# Altium PCB TS_24 UCM R1 Backup.PcbDoc
Units mm, origin at the board's own origin, x right, y up, seen from the top; angles counter-clockwise.
Board outline 86 x 54 mm, 4 copper layers (Top Layer, Int1 (PWR), Int2 (GND), Bottom Layer), stack 1.369 mm thick; 72 components, 44 nets, 273 pads, 77 vias.
Unrouted connection lines stored in the file: 6.
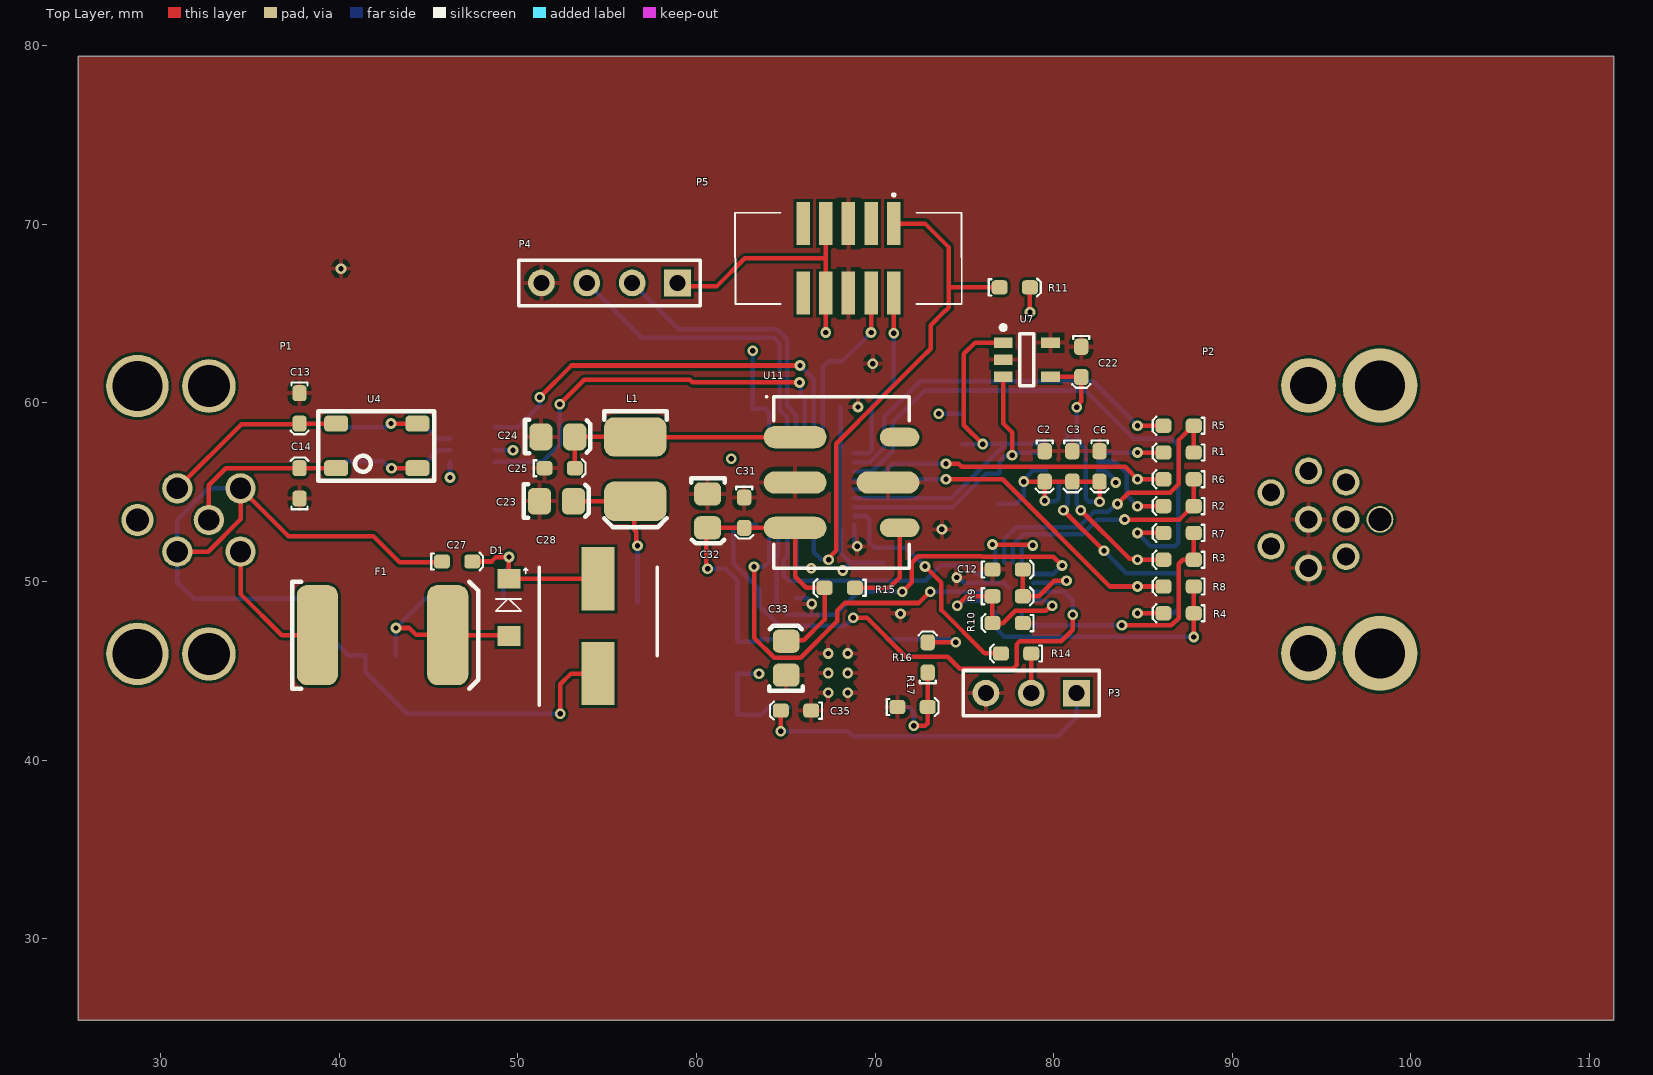
[diagram p0: Top Layer view]
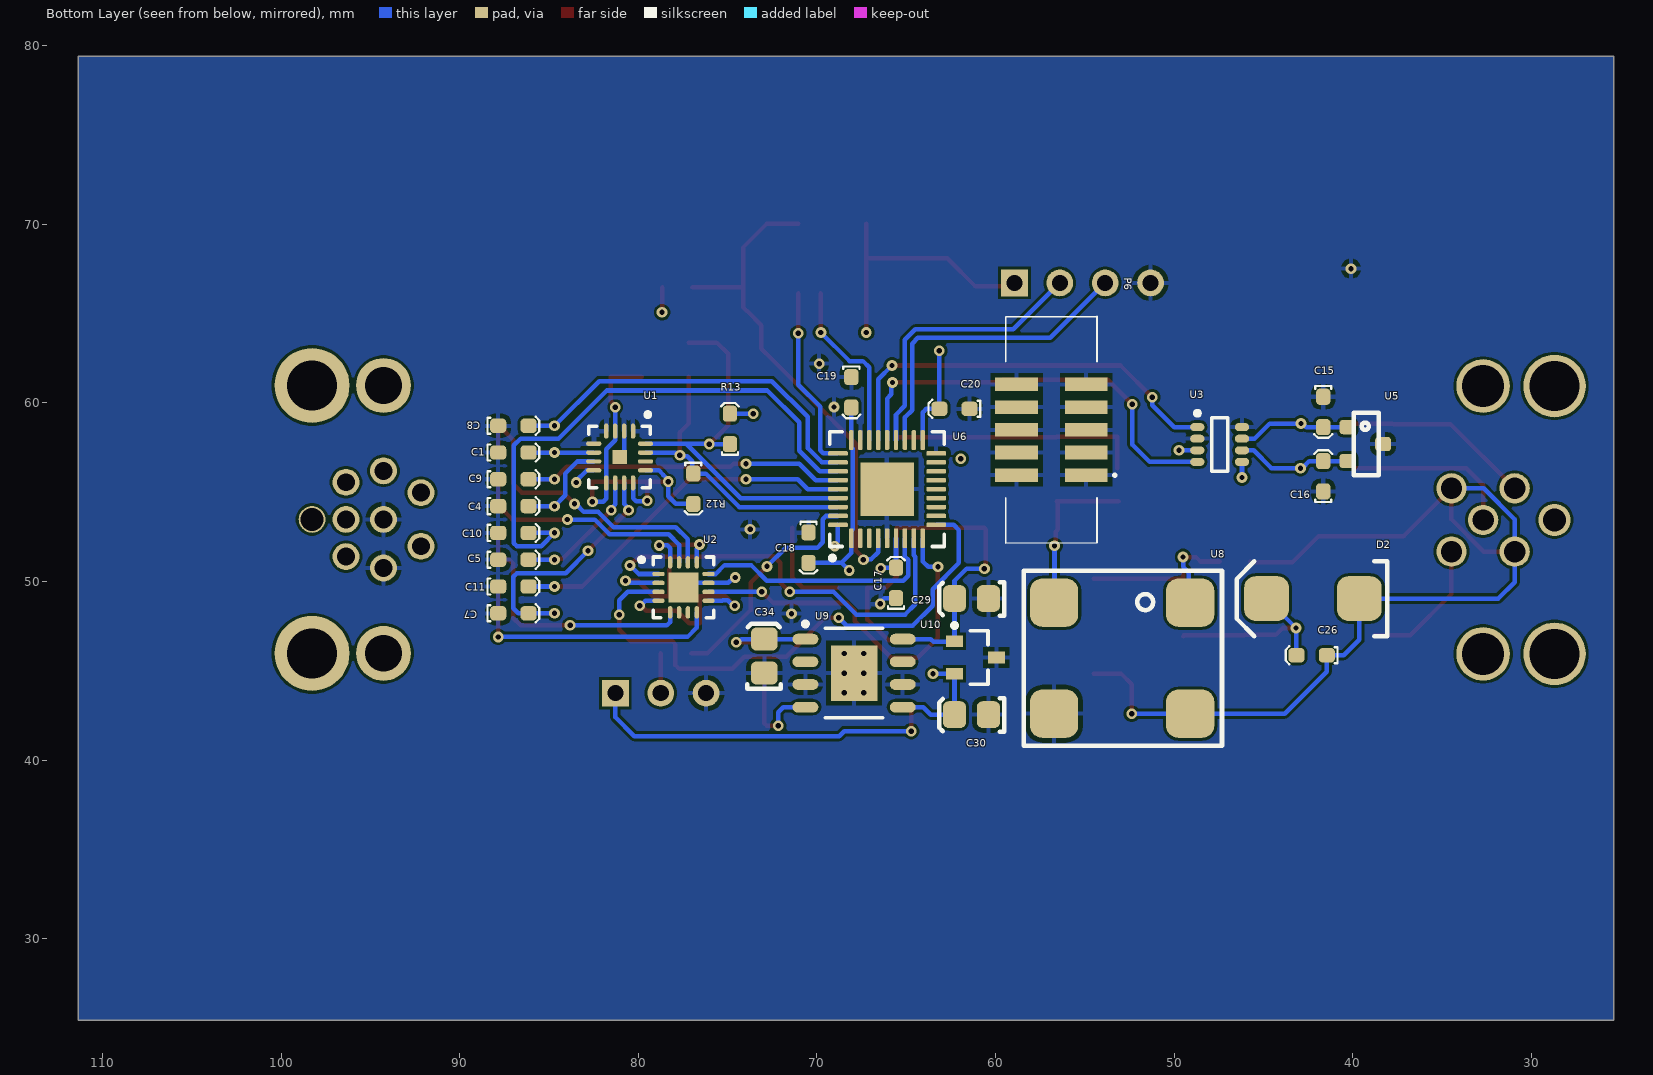
[diagram p1: Bottom Layer view, seen from below]
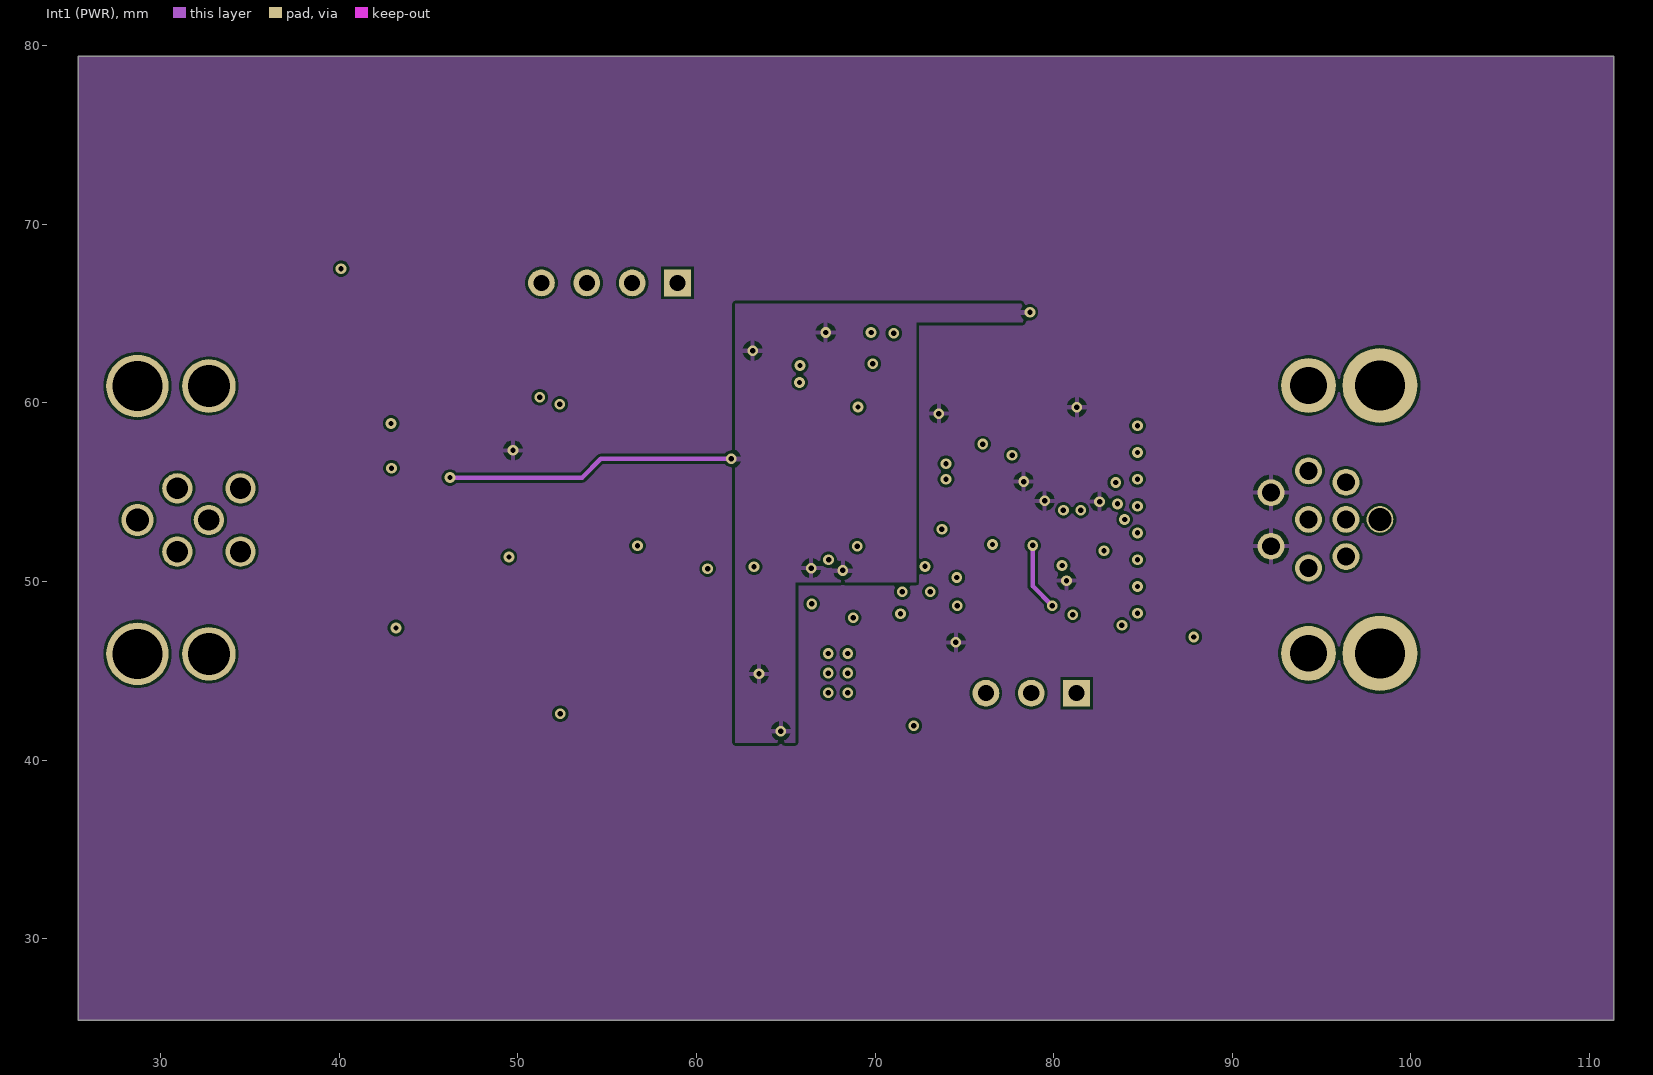
[diagram p2: Int1 (PWR)]
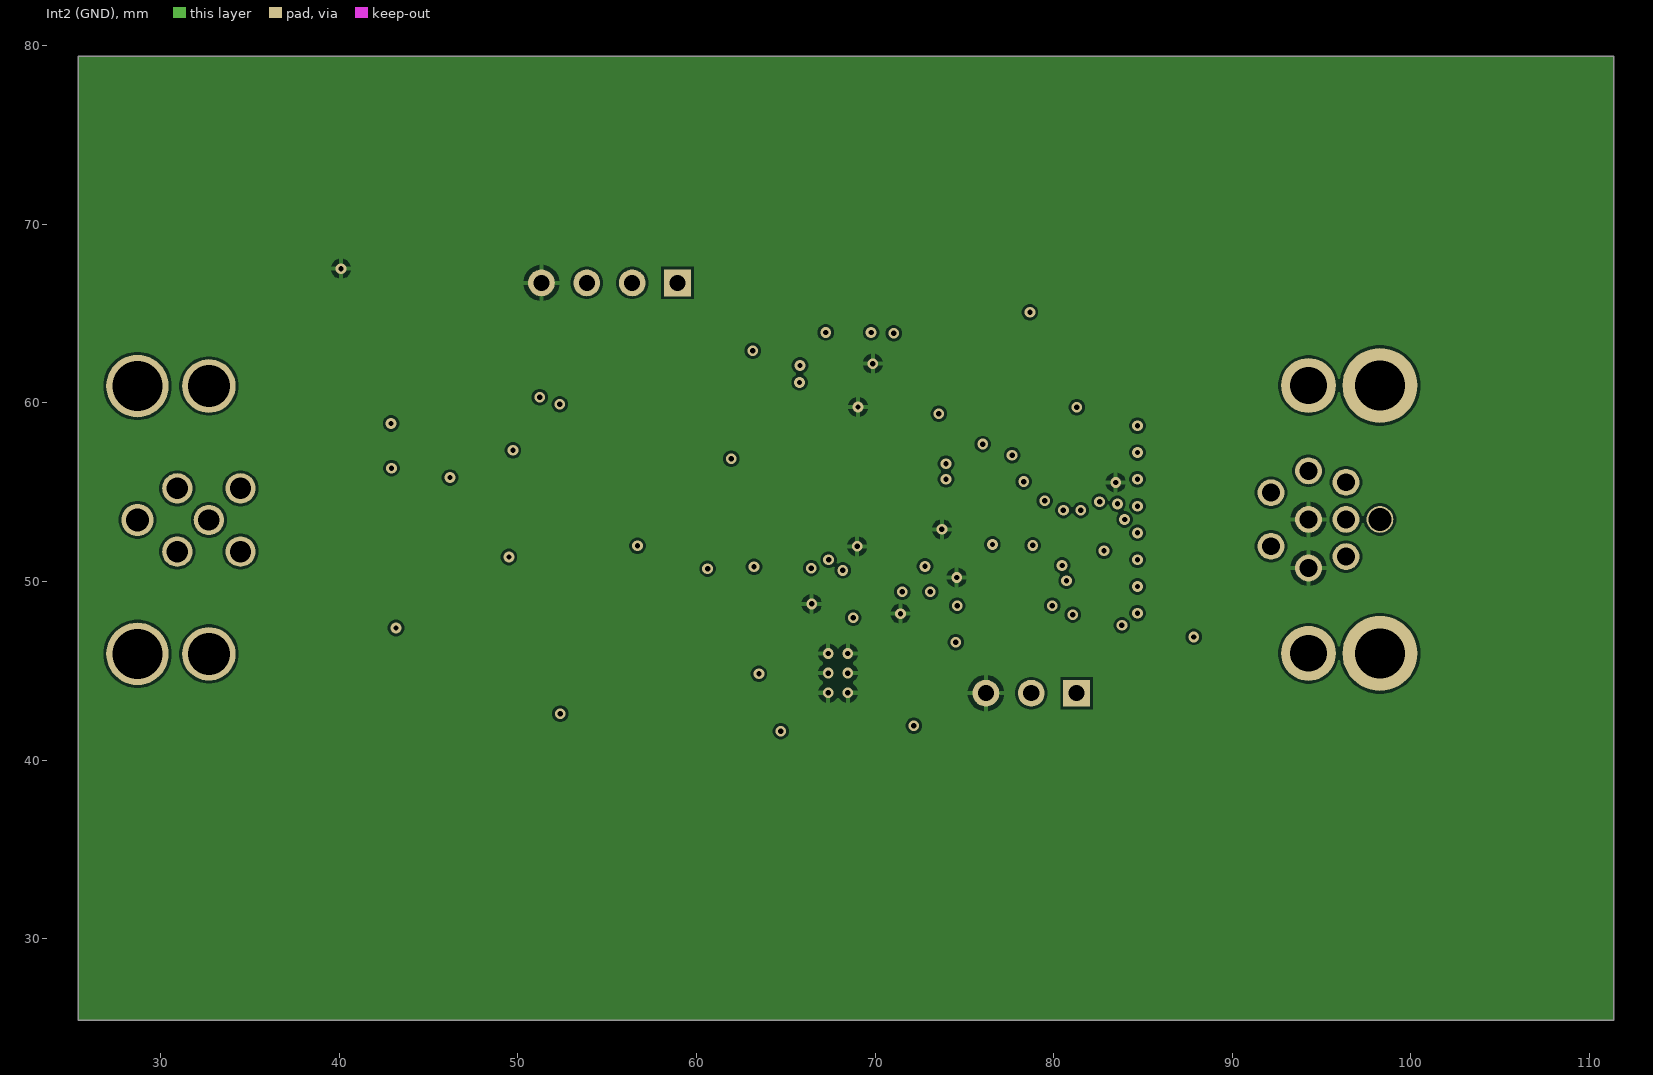
[diagram p3: Int2 (GND)]
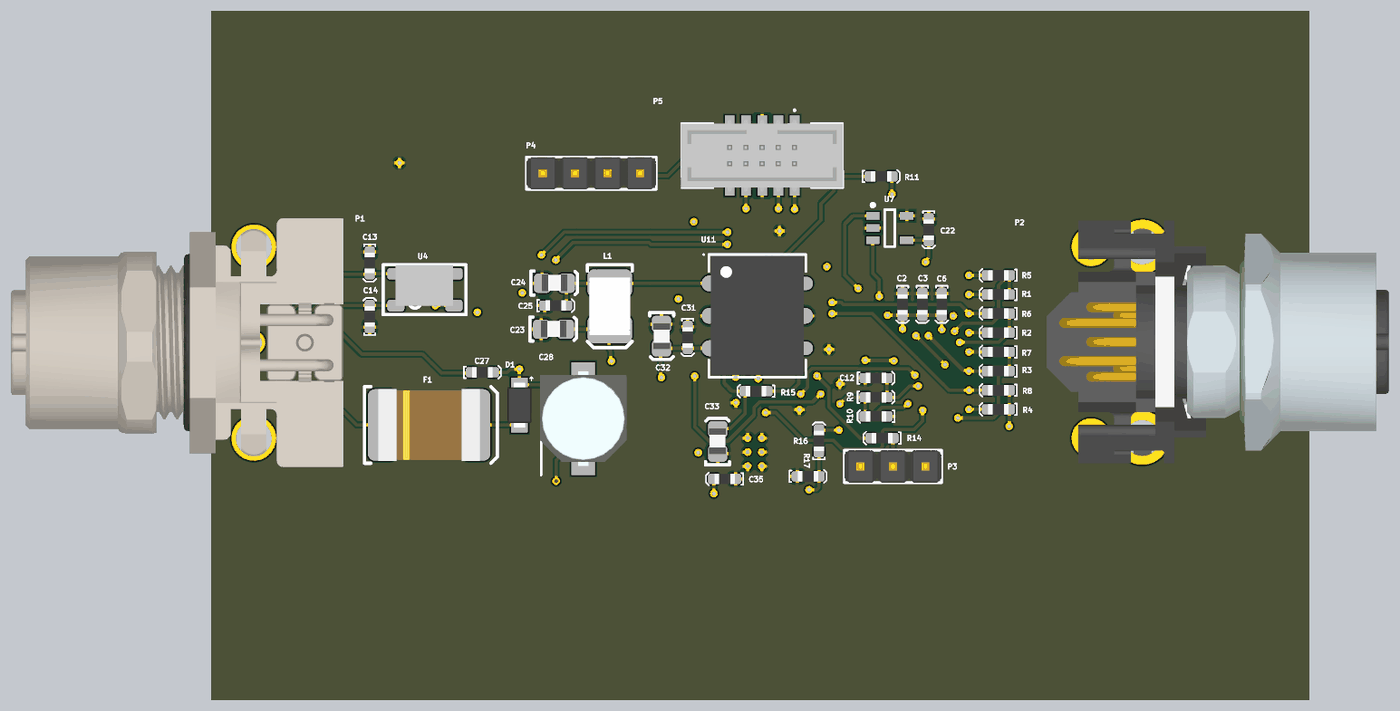
[diagram p4: 3D render of the assembled board from above, using the file's embedded part models]
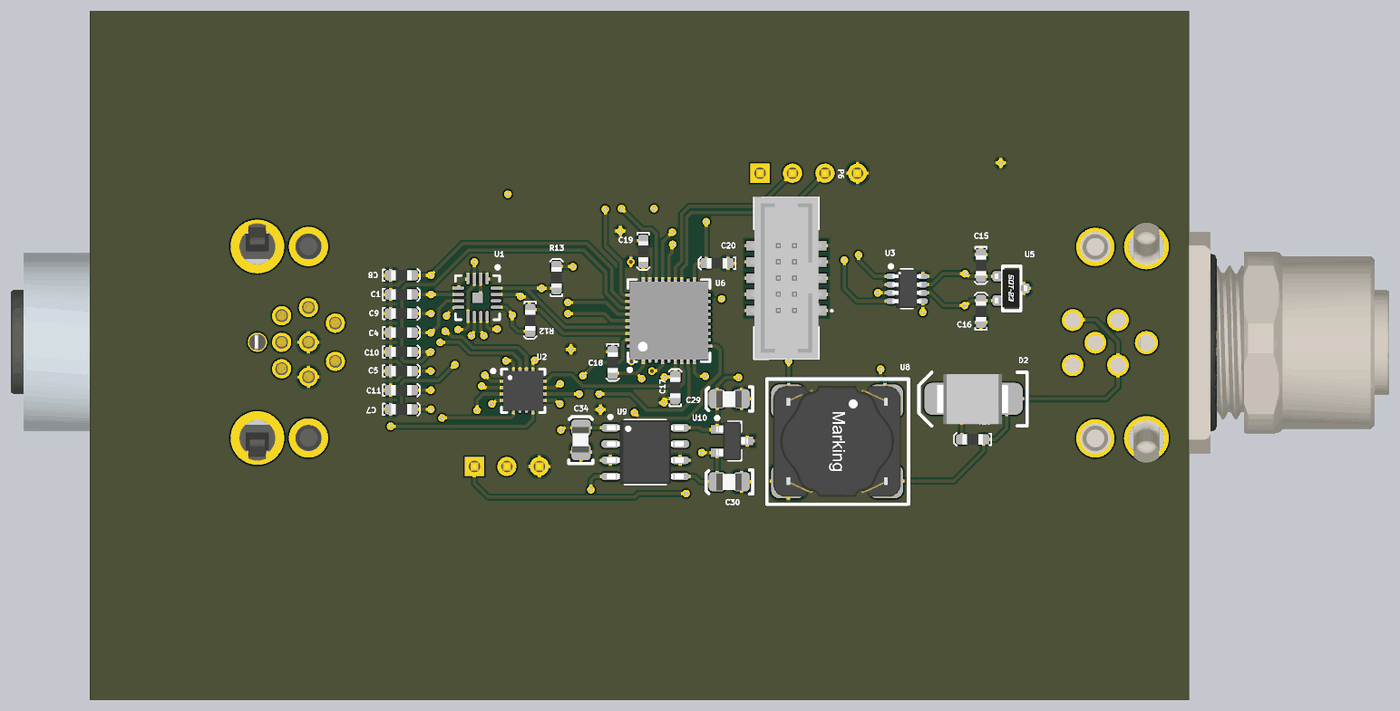
[diagram p5: 3D render of the assembled board from below, using the file's embedded part models]

## Layer stack, top to bottom
Top Solder: solder mask 0.0254, SM-001, Dk 4
Top Layer: signal copper 0.035
Dielectric 1: prepreg 0.1295, PP-017, Dk 4.3
Dielectric 2: prepreg 0.1295, PP-017, Dk 4.3
Int1 (PWR): signal copper 0.035
Dielectric 3: core 0.7112, Core-039, Dk 4.8
Int2 (GND): signal copper 0.035
Dielectric 4: prepreg 0.1295, PP-017, Dk 4.3
Dielectric 5: prepreg 0.1295, PP-017, Dk 4.3
Bottom Layer: signal copper 0.035
Bottom Solder: solder mask 0.0254, SM-001, Dk 4

## Board outline
25.375,25.425 25.375,79.425 111.375,79.425 111.375,25.425

## Design rules (kind name [scope] priority, off if disabled: settings)
Clearance Clearance_1 [(ExistsOnLayer('Int1 (PWR)') Or ExistsOnLayer('Int2 (GND)')) vs (ExistsOnLayer('Int1 (PWR)') Or ExistsOnLayer('Int2 (GND)'))] p1: gap=0.15 ignorepadtopadclearanceinfootprint=FALSE except(0.254: Hole-Hole) sourcerule=36 cellrowname=All cellrowtype=0 cellcolname=All cellcoltype=0 innerlayers=TRUE
Clearance Clearance_2 [(ExistsOnLayer('Top Layer') Or ExistsOnLayer('Bottom Layer')) vs (ExistsOnLayer('Top Layer') Or ExistsOnLayer('Bottom Layer'))] p2: gap=0.15 ignorepadtopadclearanceinfootprint=FALSE except(0.254: Hole-Hole) sourcerule=36 cellrowname=All cellrowtype=0 cellcolname=All cellcoltype=0 outerlayers=TRUE
Clearance [All] p3: gap=0.254 ignorepadtopadclearanceinfootprint=FALSE ismatrix=TRUE
PolygonConnect [All] p1: connectstyle=Relief reliefconductorwidth=0.254 reliefentries=4 polygonreliefangle="90 Angle" airgapwidth=0.254
RoutingVias [All] p1: holewidth=0.711 width=1.27 viastyle="Through Hole" minholewidth=0.711 minwidth=1.27 maxholewidth=0.711 maxwidth=1.27
SolderMaskExpansion [All] p1: expansion=0.102 istentingtop=FALSE
Width [All] p1: maxlimit=0.254 minlimit=0.254 preferedwidth=0.254
30 further rules are at their usual default settings.

## Classes and differential pairs
component class "U_Power Supply": C23 C24 C25 C26 C27 C28 C29 C30 C31 C32 C33 C34 C35 D1 D2 F1 L1 R15 R16 R17 U8 U9 U10 U11
component class U_Microcontroller: C17 C18 C19 C20 C22 P3 P4 P5 R11 R12 R13 R14 U6 U7
component class U_Digital_Outputs: C12 R9 R10 U2
component class U_Digital_Inputs: C8 C9 C10 C11 R5 R6 R7 R8
component class U_CAN: C13 C14 C15 C16 U3 U4 U5
component class U_Analog_Input: C1 C2 C3 C4 C5 C6 C7 R1 R2 R3 R4 U1
component class "Top Level": P1 P2

## Components (designator, comment, footprint, x,y, rotation, side; value= is the part's Value field where it differs from the comment)
C1 "100nF" 0603 87.85,57.225 r180 bottom
C2 "100nF" 0603 79.5,57.3 r270 top
C3 "100nF" 0603 81.05,57.3 r270 top
C4 "100nF" 0603 87.85,54.225 r180 bottom
C5 "100nF" 0603 87.85,51.225 r180 bottom
C6 "100nF" 0603 82.575,57.3 r270 top
C7 "100nF" 0603 87.85,48.225 r180 bottom
C8 "10nF" 0603 87.85,58.725 r180 bottom
C9 "10nF" 0603 87.85,55.73 r180 bottom
C10 "10nF" 0603 87.85,52.725 r180 bottom
C11 "10nF" 0603 87.85,49.725 r180 bottom
C12 "100nF" 0603 76.575,50.675 r0 top
C13 "100pF" 0603 37.775,60.55 r270 top
C14 "100pF" 0603 37.775,54.65 r90 top
C15 "100pF" 0603 41.65,60.35 r270 bottom
C16 "100pF" 0603 41.65,55.05 r90 bottom
C17 "100nF" 0603 65.575,49.075 r90 bottom
C18 "100nF" 0603 70.475,52.75 r270 bottom
C19 "100nF" 0603 68.075,61.45 r270 bottom
C20 "100nF" 0603 61.45,59.675 r0 bottom
C22 "100nF" 0603 81.55,63.15 r270 top
C23 "10uF" 0805 52.175,54.526 r0 top
C24 "10uF" 0805 52.25,58.126 r0 top
C25 "100nF" 0603 51.488,56.35 r0 top
C26 "100nF" 0603 41.45,45.875 r0 bottom
C27 "100nF" 0603 45.75,51.125 r0 top
C28 "47uF" "CHEMI-CON ELCO" 54.5,47.5 r90 top
C29 "1µF" 0805 61.362,49.025 r0 bottom
C30 "10uF" 0805 61.362,42.525 r0 bottom
C31 "100nF" 0603 62.675,54.71 r270 top
C32 "22uF" 0805 60.65,53.948 r270 top
C33 "1µF" 0805 65,45.725 r90 top
C34 "10uF" 0805 72.975,45.842 r90 bottom
C35 "100nF" 0603 66.425,42.775 r180 top
D1 "PMEG100T10ELR-QX" "NXP SOD123W" 49.5,48.55 r270 top
D2 "SM6T36CAY" "ST SMB DIODE" 42.225,49.05 r180 bottom
F1 "0ZCF0100AF2A" 2920 38.775,47 r0 top
L1 "12uH" 1812 56.575,56.3 r270 top
P1 "NMEA" 43-01203 32.7,53.45 r90 top
P2 "43-02639" 43-02639 94.275,53.48 r90 top
P3 "2.54mm" "TH 2.54mm Header 1x3" 81.29,43.75 r180 top
P4 "2.54mm" "TH 2.54mm Header 1x4" 58.94,66.725 r180 top
P5 "1.27mm" 3221-10-0300-00 68.51,68.1 r180 top
P6 "1.27mm" 3221-10-0300-00 56.875,58.5 r90 bottom (schematic designator P5)
R1 "510R" 0603 87.85,57.225 r180 top
R2 "510R" 0603 87.85,54.225 r180 top
R3 "510R" 0603 87.85,51.225 r180 top
R4 "510R" 0603 87.85,48.225 r180 top
R5 "10k" 0603 87.85,58.725 r180 top
R6 "10k" 0603 87.85,55.73 r180 top
R7 "10k" 0603 87.85,52.725 r180 top
R8 "10k" 0603 87.85,49.725 r180 top
R9 "20K" 0603 76.575,49.175 r0 top
R10 "10k" 0603 78.275,47.675 r180 top
R11 "10k" 0603 76.975,66.475 r0 top
R12 "2K" 0603 76.925,56.05 r270 bottom
R13 "2K" 0603 74.875,57.7 r90 bottom
R14 "10k" 0603 78.75,45.975 r180 top
R15 "330K" 0603 68.875,49.65 r180 top
R16 "10k" 0603 72.95,44.9 r90 top
R17 "20K" 0603 71.25,42.975 r0 top
U1 "ADS122C04IRTER" "TI 16-WQFN (3x3)" 81.05,56.975 r270 bottom
U2 "TLV9004IRTER" "TI 16-WQFN (3x3, 1.68mm)" 77.475,49.675 r180 bottom
U3 "TCAN1044AVDDFRQ1" "TI SOT23-8" 47.45,57.675 r180 bottom
U4 "B82787C0104H002" "TDK 4-PC Pad" 39.825,56.35 r0 top value="100µH @ 100kHz"
U5 "NUP2105L" "ON SOT-23" 39.3,57.7 r270 bottom
U6 "STM32F103T8U6" STM_QFN-36 66.075,55.175 r90 bottom
U7 "24FC16T-E/OT" "MCP SOT-23-5" 78.5,62.425 r0 top
U8 "744272121" "Wurth 4-PC Pad" 56.72,42.6 r180 bottom value="120uH @ 100kHz"
U9 "TPS7B4253-Q1" "TI 8-PowerSOIC" 67.925,44.875 r180 bottom
U10 "AP7375" "DI SOT-23-3" 61.125,45.75 r180 bottom
U11 "K78X6MT-500R4" K78X6MT-500R4 68.125,55.55 r0 top

## Footprints (in the part's own frame and the unit in brackets; to place one, negate y for a bottom-side part, rotate by r counter-clockwise, add the part's x,y. Pads: shape width x height; smd on the part's side, far side on the other; paste and mask are expansions set on the pad)
43-01203 [mm]
  round 1.7 hole 1.2: 1(1.77,-1.77) 2(-1.77,-1.77) 3(-1.77,1.77) 4(1.77,1.77) 5(0,0)
  round 3 hole 2.35: 15(-7.5,0) 15(7.5,0)
  round 3.5 hole 2.8: 15(-7.5,4) 15(7.5,4)
  round 1.8 hole 1.3: 15(0,4)
  body extent -9.75,-3 9.75,23, height 16
43-02639 [mm]
  round 1.5 hole 1: 1(-1.5,2.1) 2(1.5,2.1) 3(2.72,0) 4(2.08,-2.1) 5(0,-2.1) 6(-2.08,-2.1) 7(-2.72,0) 8(0,0)
  round 3.075 hole 2.05: MH1(-7.5,0) MH3(7.5,0)
  round 4.2 hole 2.8: MH2(-7.5,-4) MH4(7.5,-4)
  round 1.5 hole 1.3: MH5(0,-4)
  body extent -9.48,-23.3 9.52,3.5, height 16.1
0603 [mm]
  rrect50% 0.9x0.8 smd: 1(0,0) 2(1.7,0)
  silkscreen extent -0.6,-0.5 2.3,0.5, body extent 0.05,-0.42 1.65,0.43, height 0.6
0805 [mm]
  rrect50% 1.3x1.5 smd: 1(-0.962,-0.026) 2(0.938,-0.026)
  silkscreen extent -1.85,-0.95 1.8,0.93, body extent -1,-0.65 1,0.66, height 0.73
1812 [mm]
  rrect50% 2.2x3.5 smd: 1(-1.8,0) 2(1.8,0)
  silkscreen extent -3.25,-1.75 3.25,1.75, body extent -2.25,-1.6 2.25,1.6, height 2.5
2920 [mm]
  rrect50% 2.3x5.6 smd: 1(0,0) 2(7.3,0)
  silkscreen extent -1.4,-3 9,3, body extent -0.34,-2.81 7.64,2.81, height 1.14
3221-10-0300-00 [mm]
  rect 0.76x2.4 smd: 1(-2.54,-1.95) 2(-2.54,1.95) 3(-1.27,-1.95) 4(-1.27,1.95) 5(0,-1.95) 6(0,1.95) 7(1.27,-1.95) 8(1.27,1.95) 9(2.54,-1.95) 10(2.54,1.95)
  silkscreen extent -6.35,-3.6 6.35,2.55, body extent -6.34,-2.8 6.36,2.8, height 5.25
"CHEMI-CON ELCO" [mm]
  rect 3.55x1.85 smd: 1(-2.65,0) 2(2.65,0)
  silkscreen extent -4.43,-3.3 3.3,3.3, body extent -3.7,-3.4 3.7,3.4, height 6.1
"DI SOT-23-3" [mm] "SOT23, 3-Leads, Body 2.90x2.40mm, Pitch 0.92mm, IPC Medium Density"
  rect 0.95x0.65 smd: 1(-1.175,0.915) 2(-1.175,-0.915) 3(1.175,0)
  silkscreen extent -1.3,-1.5 0.7,1.91, body extent -1.25,-1.5 1.25,1.5, height 1.1
K78X6MT-500R4 [mm] "PSON, 6-Leads, Body 9.00x7.00mm, Pitch 2.54mm, IPC Low Density"
  oval 3.52x1.25 smd: 1(-2.6,2.54) 2(-2.6,0) 3(-2.6,-2.54) 5(2.6,0)
  oval 2.22x1.05 smd: 4(3.25,-2.54) 6(3.25,2.54)
  silkscreen extent -4.25,-4.8 3.8,4.85, body extent -3.65,-4.65 3.65,4.65, height 3.4
"MCP SOT-23-5" [mm] "SOT23, 5-Leads, Body 2.90x2.80mm, Pitch 0.95mm, IPC Medium Density"
  rect 1.05x0.6 smd: 1(-1.325,0.95) 2(-1.325,0) 3(-1.325,-0.95) 4(1.325,-0.95) 5(1.325,0.95)
  silkscreen extent -1.45,-1.45 0.4,1.92, body extent -0.8,-1.45 0.8,1.45, height 1.45
"NXP SOD123W" [mm]
  rect 1.1x1.3 smd: A(1.6,0) K(-1.6,0)
  silkscreen extent -2.2,-0.73 0.2,1.04, body extent -1.75,-0.95 1.75,0.95, height 1.1
"ON SOT-23" [mm] "NUP2105L"
  rrect50% 0.8x0.9 smd: 1(-0.95,-1) 2(0.95,-1) 3(0,1)
  silkscreen extent -1.75,-0.65 1.75,0.75, body extent -1.5,-1.28 1.5,1.27, height 1
"ST SMB DIODE" [mm]
  rrect50% 2.5x2.5 smd: A(2.6,0) K(-2.6,0)
  silkscreen extent -4.28,-2.12 4.17,2.08, body extent -2.88,-1.99 2.72,1.95, height 2.5
STM_QFN-36 [mm]
  rrect50% 1.1x0.25 smd: 1(-2.75,2) 2(-2.75,1.5) 3(-2.75,1) 4(-2.75,0.5) 5(-2.75,0) 6(-2.75,-0.5) 7(-2.75,-1) 8(-2.75,-1.5) 9(-2.75,-2) 19(2.75,-2) 20(2.75,-1.5) 21(2.75,-1) 22(2.75,-0.5) 23(2.75,0) 24(2.75,0.5) 25(2.75,1) 26(2.75,1.5) 27(2.75,2)
  rrect50% 0.25x1.1 smd: 10(-2,-2.75) 11(-1.5,-2.75) 12(-1,-2.75) 13(-0.5,-2.75) 14(0,-2.75) 15(0.5,-2.75) 16(1,-2.75) 17(1.5,-2.75) 18(2,-2.75) 28(2,2.75) 29(1.5,2.75) 30(1,2.75) 31(0.5,2.75) 32(0,2.75) 33(-0.5,2.75) 34(-1,2.75) 35(-1.5,2.75) 36(-2,2.75)
  rect 3x3 smd: 18(0,0)
  silkscreen extent -3.98,-3.21 3.21,3.21, body extent -3.08,-3.08 3.08,3.08, height 1
"TDK 4-PC Pad" [mm]
  rrect50% 1.35x0.9 smd: 1(0,2.5) 2(0,0) 3(4.55,0) 4(4.55,2.5)
  silkscreen extent -1,-0.7 5.5,3.2, body extent -0.02,-0.02 4.48,3.18, height 2.8
"TH 2.54mm Header 1x3" [mm]
  rect 1.5x1.5 hole 0.9: 1(0,0)
  round 1.5 hole 0.9: 2(2.54,0) 3(5.08,0)
  silkscreen extent -1.27,-1.27 6.35,1.27, body extent -1.27,-1.27 6.35,1.27, height 9.5
"TH 2.54mm Header 1x4" [mm]
  rect 1.5x1.5 hole 0.9: 1(0,0)
  round 1.5 hole 0.9: 2(2.54,0) 3(5.08,0) 4(7.62,0)
  silkscreen extent -1.27,-1.27 8.89,1.27, body extent -1.27,-1.27 8.89,1.27, height 9.5
"TI 8-PowerSOIC" [mm] "SOIC, 8-Leads, Body 4.90x3.90mm, Pitch 1.27mm, Thermal Pad 3.10x2.60mm, IPC Medium Density"
  oval 1.45x0.6 smd: 1(-2.725,1.905) 2(-2.725,0.635) 3(-2.725,-0.635) 4(-2.725,-1.905) 5(2.725,-1.905) 6(2.725,-0.635) 7(2.725,0.635) 8(2.725,1.905)
  rect 2.6x3.1 smd: 3(0,0)
  silkscreen extent -2.85,-2.5 1.6,2.88, body extent -3,-2.5 3,2.5, height 1.7
"TI 16-WQFN (3x3)" [mm] "QFN, 16-Leads, Body 3.00x3.00mm, Pitch 0.50mm, Thermal Pad 0.80x0.80mm, IPC High Density"
  oval 0.85x0.25 smd: 1(-1.45,0.75) 2(-1.45,0.25) 3(-1.45,-0.25) 4(-1.45,-0.75) 9(1.45,-0.75) 10(1.45,-0.25) 11(1.45,0.25) 12(1.45,0.75)
  rect 0.8x0.8 smd: 4(0,0)
  oval 0.25x0.85 smd: 5(-0.75,-1.45) 6(-0.25,-1.45) 7(0.25,-1.45) 8(0.75,-1.45) 13(0.75,1.45) 14(0.25,1.45) 15(-0.25,1.45) 16(-0.75,1.45)
  silkscreen extent -2.5,-1.72 1.72,1.73, body extent -1.6,-1.57 1.55,1.58, height 0.8
"TI 16-WQFN (3x3, 1.68mm)" [mm] "QFN, 16-Leads, Body 3.00x3.00mm, Pitch 0.50mm, Thermal Pad 1.68x1.68mm, IPC High Density"
  oval 0.7x0.25 smd: 1(-1.4,0.75) 2(-1.4,0.25) 3(-1.4,-0.25) 4(-1.4,-0.75) 9(1.4,-0.75) 10(1.4,-0.25) 11(1.4,0.25) 12(1.4,0.75)
  oval 0.25x0.7 smd: 5(-0.75,-1.4) 6(-0.25,-1.4) 7(0.25,-1.4) 8(0.75,-1.4) 13(0.75,1.4) 14(0.25,1.4) 15(-0.25,1.4) 16(-0.75,1.4)
  rect 1.68x1.68 smd: 11(0,0)
  silkscreen extent -2.48,-1.7 1.7,1.7, body extent -1.55,-1.55 1.55,1.55, height 0.8
"TI SOT23-8" [mm] "TSOP, 8-Leads, Body 2.90x1.60mm, Pitch 0.65mm, IPC High Density"
  oval 0.8x0.45 smd: 1(-1.25,0.975) 2(-1.25,0.325) 3(-1.25,-0.325) 4(-1.25,-0.975) 5(1.25,-0.975) 6(1.25,-0.325) 7(1.25,0.325) 8(1.25,0.975)
  silkscreen extent -1.38,-1.5 0.45,1.87, body extent -1.15,-1.5 1.15,1.5, height 1.1
"Wurth 4-PC Pad" [mm]
  rrect50% 2.7x2.7 smd: 1(7.62,6.22) 2(0,6.22) 3(0,0) 4(7.62,0)
  silkscreen extent -1.7,-1.8 9.4,8, body extent -1.19,-1.24 8.81,7.46, height 6.2

## Part data
C1 C2 C3 C4 C5 C6 C7 C12 C17 C18 C19 C20 C22 C25 C26 C27 C31 C35: library part GCM188L81H104KA57D, Digikey Part Number=490-6049-1-ND, Manufacturer=muRata, Rated Voltage=50V, Temperature Rating=X8L, Tolerance=±10%, Material=MLCC, Part Number=GCM188L81H104KA57D
C8 C9 C10 C11: library part GCM188L81H103KA03D, Digikey Part Number=490-GCM188L81H103KA03DCT-ND, Manufacturer=muRata, Rated Voltage=50V, Temperature Rating=X8L, Tolerance=±10%, Material=MLCC, Part Number=GCM188L81H103KA03D
C13 C14 C15 C16: library part GRM1885C1H101JA01D, Digikey Part Number=490-1427-1-ND, Manufacturer="Murata Electronics", Rated Voltage=50V, Temperature Rating="C0G, NP0", Tolerance=±5%, Material=MLCC, Part Number=GRM1885C1H101JA01D
C23 C24 C30 C34: library part GRM21BR6YA106KE43L, Digikey Part Number=490-10514-6-ND, Manufacturer=muRata, Rated Voltage=50V, Temperature Rating=X5R, Tolerance=10%, Material=MLCC, Part Number=GRM21BR6YA106KE43L
C28: library part HHXA350ARA470MF61G, Part Number=HHXA350ARA470MF61G
C29 C33: library part GCM21BR71H105KA03L, Digikey Part Number=490-10675-1-ND, Manufacturer=muRata, Rated Voltage=50V, Temperature Rating=X7R, Tolerance=±10%, Material=MLCC, Part Number=GCM21BR71H105KA03L
C32: library part GRM21BR61A226ME51L, Digikey Part Number=490-10511-1-ND, Manufacturer=muRata, Rated Voltage=50V, Temperature Rating=X5R, Tolerance=20%, Material=MLCC, Part Number=GRM21BR61A226ME51L
D1: Breakdown Voltage="100 V", Digikey Part Number=1727-PMEG100T10ELR-QXCT-ND, Forward Voltage="0.75 V @ 1A", Manufacturer="Nexperia USA Inc.", Rated Power="680 mW", Part Number=PMEG100T10ELR-QX
D2: Breakdown Voltage="30.8 V", Digikey Part Number=497-10804-1-ND, Manufacturer=STMicroelectronics, Rated Power=600W, Forward Voltage="30.8 V", Part Number=SM6T36CAY
F1: "PTC RESET FUSE 60V 1A 292", Digikey Part Number=507-2070-1-ND, Manufacturer="Littelfuse Inc.", Digikey Link=https://www.digikey.com/product-detail/en/bel-fuse-inc/0ZCF0100AF2A/507-2070-1-ND/6210547, Part Number=0ZCF0100AF2A
L1: library part RLS-126, Digikey Part Number=945-3429-ND, Manufacturer=Recom, Rated Current="0.8 A", Tolerance=0.2, Impedance=230mOhm, Material=Wirewound, Part Number=RLS-126
P1: library part 43-01203, "M12 NMEA 2000 Header", Digikey Part Number=626-1511-ND, Angle=90, Contact=Gold, Flange=Yes, Part Number=43-01203, Positions=5
P2: "M12, 8 Pin Connector", Angle=90, Contact="Copper Alloy", Flange=Yes, Part Number=43-02639, Positions=8
P3: library part "TH 2.54mm Header 1x3", Angle=0, Contact=NA, Flange=No, Part Number="TH 2.54mm Header 1x3", Pitch=2.54mm, Positions=3, Row Spacing=2.54mm
P4: library part "TH 2.54mm Header 1x4", Angle=0, Contact=NA, Flange=No, Part Number="TH 2.54mm Header 1x4", Pitch=2.54mm, Positions=4, Row Spacing=2.54mm
P5 P6: library part "SMD 1.27mm Header 2x5 (3221-10-0300-00)", Angle=0, Contact=NA, Flange=No, Part Number="SMD 1.27mm Header 2x5 (3221-10-0300-00)", Pitch=1.27mm, Positions=10, Row Spacing=1.27mm
R1 R2 R3 R4: library part RC0603FR-07510RL, Digikey Part Number=311-510HRCT-ND, Manufacturer=YAGEO, Rated Power=0.1W, Tolerance=0.01, Material=FR-07, Part Number=RC0603FR-07510RL
R5 R6 R7 R8 R10 R11 R14 R16: library part RC0603FR-0710KL, Digikey Part Number=311-10.0KHRCT-ND, Manufacturer=YAGEO, Rated Power=0.1W, Tolerance=0.01, Material=FR-07, Part Number=RC0603FR-0710KL
R9 R17: library part RC0603FR-0720KL, Digikey Part Number=311-20.0KHRCT-ND, Manufacturer=YAGEO, Rated Power=0.1W, Tolerance=0.01, Material=FR-07, Part Number=RC0603FR-0720KL
R12 R13: library part RC0603FR-072KL, Digikey Part Number=311-2.00KHRCT-ND, Manufacturer=YAGEO, Rated Power=0.1W, Tolerance=0.01, Material=FR-07, Part Number=RC0603FR-072KL
R15: library part RC0603JR-07330KL, Digikey Part Number=311-330KGRCT-ND, Manufacturer=YAGEO, Rated Power=0.1W, Tolerance=0.01, Material=FR-07, Part Number=RC0603JR-07330KL
U1: "IC ADC 24BIT SIGMA-DELTA 16WQFN", Digikey Part Number=296-50886-1-ND, Manufacturer="Texas Instruments", Complex IC=1, Digikey Link=https://www.digikey.com.au/en/products/detail/texas-instruments/ADS122C04IRTER/9665929, Part Number=ADS122C04IRTER
U2: "IC OPAMP GP 4 CIRCUIT 16WQFN", Digikey Part Number=296-51828-1-ND, Manufacturer="Texas Instruments", Complex IC=0, Digikey Link=https://www.digikey.com.au/en/products/detail/texas-instruments/TLV9004IRTER/9674913, Part Number=TLV9004IRTER
U3: "IC TRANSCEIVER HALF 1/1 TSOT23-8", Digikey Part Number=296-TCAN1044AVDDFRQ1CT-ND, Manufacturer="Texas Instruments", Complex IC=0, Part Number=TCAN1044AVDDFRQ1
U4: Digikey Part Number=495-4598-1-ND, Manufacturer="EPCOS (TDK)", Rated Current=150mA, Impedance="5.8 kOhms @ 10MHz", Material=Wirewound, Part Number=B82787C0104H002
U5: "Dual Line CAN Bus Protector", Digikey Part Number=NUP2105LT1GOSCT-ND, Manufacturer="ON Semiconductor", Digikey Link=https://www.digikey.com/product-detail/en/on-semiconductor/NUP2105LT1G/NUP2105LT1GOSCT-ND/1485001, Part Number=NUP2105L
U6: "ARM® Cortex®-M3 STM32F1 Microcontroller IC 32-Bit 72MHz 64KB (64K x 8) FLASH QFN", Manufacturer="ST Microelectronics", Complex IC=1, Digikey Link=https://www.digikey.com/en/products/detail/stmicroelectronics/stm32f103t8u6/1852493, Digikey Part Number=STM32F103T8U6, Part Number=STM32F103T8U6
U7: "IC EEPROM 16KBIT I2C SOT23-5", Digikey Part Number=150-24FC16T-E/OTCT-ND, Manufacturer="Microchip Technology", Complex IC=0, Part Number=24FC16T-E/OT
U8: Digikey Part Number=732-1489-1-ND, Manufacturer="Wurth Electronics Inc", Rated Current="2.5 A", Impedance="460 Ohms @ 30MHz", Material=Wirewound, Part Number=744272121
U9: "IC REG LIN POS ADJ 300MA 8SO", Digikey Part Number=296-43781-1-ND, Input Voltage=40V, Manufacturer="Texas Instruments", Output Current="300 mA", Output Voltage=Variable, Part Number=TPS7B4253-Q1
U10: library part AP7375-33SA-7, "IC REG LIN 3.3V 300MA SOT23-3", Digikey Part Number=31-AP7375-33SA-7CT-ND, Input Voltage="3V - 45V", Manufacturer="Diodes Incorporated", Output Current="300 mA", Output Voltage="3.3 V", Part Number=AP7375-33SA-7
U11: "DC DC CONVERTER +/-6.5V 4.9W", Digikey Part Number=2725-K78X6MT-500R4CT-ND, Input Voltage="8V - 36V", Manufacturer="Mornsun America, LLC", Output Current="500 mA", Output Voltage="6.5 V", Part Number=K78X6MT-500R4

## Via types
v1: diameter 0.6, hole 0.3, Top Layer to Bottom Layer, 77 vias

## Nets (pads, with @x,y where several pads share a name; then routed paths per layer and width w, separated by ;. In a path a pad name is that pad's centre, name@x,y a point inside that pad or via, vN(x,y) a via of type N, cw(c..) or ccw(c..) an arc to the next point about the centre after c; other vN are vias at no path point)
1.67V: R9.1 R10.2 U2.4 U2.9 U2.13 U2.16 | length 18.8
  Top Layer w0.254: v1(74.6,48.65) 75.125,49.175 R9.1 R10.2 77.15,47.675 77.85,48.375 79.556,48.375 79.831,48.65 v1(79.925,48.65) ; v1(76.575,52.075) 76.6,52.05 78.8,52.05 v1(78.825,52.025)
  Int1 (PWR) w0.254: v1(78.825,52.025) 78.825,49.75 v1(79.925,48.65)
  Bottom Layer w0.254: v1(74.6,48.65) 74.694,48.65 74.994,48.95 75.275,48.95 75.3,48.925 U2.9 ; v1(76.575,52.075) 76.575,51.981 76.725,51.831 U2.13 ; U2.16 78.225,51.876 78.374,52.025 v1(78.825,52.025) ; U2.4 79.606,48.925 79.881,48.65 v1(79.925,48.65)
3.3V: C17.2 C18.2 C19.2 C20.2 C30.2 C35.2 P3.1 P4.1 P5.7 P5.8 R11.2 U3.5 U6.1 U6.6 U6.19 U6.27 U9.5 U10.2 | length 79.5
  Top Layer w0.254: P4.1 59.14,66.525 61.125,66.525 62.7,68.1 67.24,68.1 ; v1(64.725,41.625) C35.2 ; v1(67.24,63.95) P5.8 67.24,68.1 ; P5.7 67.24,68.1 ; v1(78.675,65.075) R11.2
  Int1 (PWR) w0.254: v1(46.2,55.825) 53.6,55.825 54.65,56.875 v1(61.95,56.875)
  Bottom Layer w0.254: v1(46.2,55.825) U3.5 ; v1(63.15,62.925) C20.2 63.875,59.675 64.001,59.549 64.075,59.475 U6.19 ; v1(63.5,44.835) U10.2 C30.2 63.626,42.551 64.045,42.97 U9.5 ; v1(64.725,41.625) 68.478,41.625 68.755,41.348 80.223,41.348 81.29,42.415 P3.1 ; U6.6 C17.2 65.588,50.763 66.412,50.763 v1(66.425,50.75) ; C19.2 U6.27 68.075,57.504 67.998,57.427 67.998,52.923 68.075,52.846 U6.1 68.075,51.6 68.625,51.05 ; v1(68.2,50.625) 68.625,51.05 ; C18.2 68.625,51.05
5V: C2.2 C3.2 C6.2 C12.2 C22.2 C34.2 P2.1 P2.2 R9.2 R12.2 R13.2 R16.2 U1.3 U1.9 U1.12 U1.13 U2.2 U3.3 U7.4 U9.1 | length 35.9
  Top Layer w0.254: R16.2 v1(74.525,46.6) ; C12.2 R9.2 79.174,49.175 80.044,50.045 80.72,50.045 v1(80.725,50.05) ; v1(78.325,55.6) C2.2 ; v1(79.5,54.525) C2.2 ; U7.4 79.838,61.463 81.537,61.463 C22.2 81.55,60.106 81.3,59.856 v1(81.3,59.763) ; v1(82.575,54.475) C6.2 C3.2 C2.2
  Bottom Layer w0.254: U3.3 v1(49.725,57.35) ; U9.1 C34.2 74.251,46.78 74.431,46.6 v1(74.525,46.6) ; v1(73.575,59.4) R13.2 ; R12.2 77.9,54.35 78.325,54.775 v1(78.325,55.6) 78.325,55.694 78.596,55.965 78.596,55.971 78.85,56.225 U1.13 ; U2.2 80.506,49.925 80.631,50.05 v1(80.725,50.05) ; v1(79.5,54.525) 79.525,54.5 80.125,54.5 80.3,54.675 U1.12 ; v1(81.3,59.763) U1.3 81.302,58.423 81.302,57.915 81.798,57.419 81.798,55.527 U1.9 81.8,54.65 81.975,54.475 v1(82.575,54.475)
AIN-0: C7.2 R4.2 U1.11 | length 15.3
  Top Layer w0.254: v1(80.55,54) v1(82.825,51.725) ; v1(84.7,48.225) R4.2
  Bottom Layer w0.254: v1(80.55,54) 80.55,54.094 80.8,54.344 U1.11 ; v1(82.825,51.725) 84.075,50.475 86.8,50.475 87,50.275 87,48.499 86.726,48.225 C7.2 v1(84.7,48.225)
AIN-1: C5.2 R3.2 U1.10 | length 8.8
  Top Layer w0.254: v1(81.525,54) 84.234,51.291 84.634,51.291 v1(84.7,51.225) R3.2
  Bottom Layer w0.254: U1.10 81.3,54.319 81.525,54.094 v1(81.525,54) ; v1(84.7,51.225) C5.2
AIN-2: C4.2 R2.2 U1.7 | length 6.9
  Top Layer w0.254: v1(84.7,54.225) R2.2
  Bottom Layer w0.254: U1.7 83.425,56.725 84.1,56.05 84.1,54.825 v1(84.7,54.225) C4.2
AIN-3: C1.2 R1.2 U1.6 | length 5.2
  Top Layer w0.254: v1@84.6,57.2 v1@84.613,57.212 ; v1(84.7,57.225) R1.2 R1.2@86.138,57.212
  Bottom Layer w0.254: U1.6 v1(84.7,57.225) C1.2 C1.2@86.138,57.212
BOOT0: P3.2 R14.1 | length 2.2
  Top Layer w0.254: P3.2 R14.1
CAN-H: C13.2 P1.4 U4.1 | length 10.4
  Top Layer w0.254: P1.4 34.51,58.8 37.725,58.8 C13.2 U4.1
CAN-L: C14.2 P1.5 U4.2 | length 9.5
  Top Layer w0.254: P1.5 32.7,55.4 33.65,56.35 C14.2 U4.2
GLV+: F1.1 P1.2 | length 7.6
  Top Layer w0.254: P1.2 34.47,49.305 36.775,47 F1.1
GLV-: C26.1 C27.1 C28.1 D2.A P1.1 P1.3 U8.4 | length 57.2
  Top Layer w0.254: P1.3 32.655,51.68 34.47,53.495 P1.1 37.14,52.55 41.9,52.55 43.375,51.075 45.7,51.075 C27.1 ; v1(52.375,42.6) 52.375,44.25 52.975,44.85 C28.1
  Bottom Layer w0.254: P1.1 32.67,55.22 30.93,53.48 P1.3 30.93,49.97 31.85,49.05 D2.A 39.625,46.75 40.5,45.875 C26.1 41.45,44.95 43.8,42.6 U8.4 v1(52.375,42.6)
GND: C1.1 C2.1 C3.1 C4.1 C5.1 C6.1 C7.1 C8.1 C9.1 C10.1 C11.1 C12.1 C13.1 C14.1 C15.1 C16.1 C17.1 C18.1 C19.1 C20.1 C22.1 C23.1 C24.1 C25.1 C29.1 C30.1 C31.1 C32.1 C33.1 C34.1 C35.1 P2.7 P2.8 P3.3 P4.4 P5.5 P5.6 P6.1 P6.2 P6.3 P6.4 P6.5 P6.6 P6.7 P6.8 P6.9 P6.10 R10.1 R17.1 U1.1 U1.2 U1.4 U1.5 U1.8 U2.11 U3.2 U3.8 U5.3 U6.5 U6.18 U6.26 U6.36 U7.2 U7.5 U8.3 U9.3 U9.6 U10.3 U11.2 U11.5 | length 8.3
  Bottom Layer w0.254: C17.1 66.219,49.075 66.45,48.844 v1(66.45,48.75) ; U6.36 68.825,52.244 69,52.069 v1(69,51.975) ; v1(74.575,50.225) 74.669,50.225 74.969,49.925 76.075,49.925 77.225,49.925 U2.11@77.475,49.675 ; U1.2 80.8,57.225 U1.4@81.05,56.975 ; U1.8 82.502,56.223 82.896,56.223 83.475,55.644 v1(83.475,55.55)
  other v1: 67.375,43.775 68.475,43.775 67.375,44.875 68.475,44.875 67.375,45.975 68.475,45.975 71.425,48.2 73.746,52.927 69.05,59.775 69.875,62.2 40.1,67.525
IO-1: P2.3 R1.1 R5.1 U2.14 | length 17.5
  Top Layer w0.254: v1(83.575,54.35) 84.2,54.975 86.52,54.975 87.019,55.474 87.019,57.944 87.8,58.725 R5.1 R1.1
  Bottom Layer w0.254: U2.14 77.225,52.375 77.9,53.05 81.391,53.05 82.239,53.898 83.064,53.898 83.516,54.35 v1(83.575,54.35)
IO-2: P2.4 R2.1 R6.1 U2.15 | length 13.5
  Top Layer w0.254: v1(83.975,53.475) 87.05,53.475 87.8,54.225 R2.1 R6.1
  Bottom Layer w0.254: U2.15 77.725,52.071 78.3,52.646 81.621,52.646 82.45,53.475 v1(83.975,53.475)
IO-3: P2.5 R3.1 R7.1 U2.5 | length 15.1
  Top Layer w0.254: v1(83.825,47.55) 83.827,47.548 86.598,47.548 87,47.95 87,51 87.225,51.225 R3.1 R7.1
  Bottom Layer w0.254: U2.5 78.227,48.273 78.227,47.723 78.4,47.55 v1(83.825,47.55)
IO-4: P2.6 R4.1 R8.1 U2.8 | length 15
  Top Layer w0.254: v1(87.85,46.9) R4.1 R8.1
  Bottom Layer w0.254: U2.8 76.725,47.425 77.25,46.9 v1(87.85,46.9) v1@87.875,46.9
NetC8_2: C8.2 R5.2 U6.29 | length 22.7
  Top Layer w0.254: v1@84.7,58.75 v1(84.7,58.725) R5.2
  Bottom Layer w0.254: U6.29 69.721,56.675 70.525,57.479 70.525,59.225 72.525,61.225 82.2,61.225 v1(84.7,58.725) C8.2
NetC9_2: C9.2 R6.2 U6.31 | length 19.6
  Top Layer w0.254: v1(73.975,56.6) 74.675,56.6 74.85,56.425 84.005,56.425 v1(84.7,55.73) R6.2 R6.2@86.102,55.777
  Bottom Layer w0.254: U6.31 70.075,55.675 71,56.6 v1(73.975,56.6) ; v1(84.7,55.73) C9.2
NetC10_2: C10.2 R7.2 U6.30 | length 33.3
  Top Layer w0.254: v1(84.7,52.725) R7.2
  Bottom Layer w0.254: U6.30 69.85,56.175 71,57.325 71,58.925 72.775,60.7 81.775,60.7 84.475,58 86.6,58 86.975,57.625 86.975,52.15 86.8,51.975 85.45,51.975 v1(84.7,52.725) C10.2
NetC11_2: C11.2 R8.2 U6.32 | length 21.5
  Top Layer w0.254: v1(73.975,55.725) 77.15,55.725 83.15,49.725 v1(84.7,49.725) R8.2
  Bottom Layer w0.254: U6.32 70.525,55.175 71.075,55.725 v1(73.975,55.725) ; v1(84.7,49.725) C11.2
NetC15_2: C15.2 U3.7 U4.4 U5.1 | length 7.8
  Top Layer w0.254: v1(42.9,58.85) U4.4
  Bottom Layer w0.254: U5.1 C15.2 42.606,58.65 42.806,58.85 v1(42.9,58.85) 44.65,58.85 45.5,58 U3.7
NetC16_2: C16.2 U3.6 U4.3 U5.2 | length 7.9
  Top Layer w0.254: v1(42.925,56.35) U4.3
  Bottom Layer w0.254: U5.2 C16.2 42.431,56.75 42.831,56.35 v1(42.925,56.35) 44.55,56.35 45.55,57.35 U3.6
NetC23_2: C23.2 L1.2 U8.2 | length 9.2
  Top Layer w0.254: C23.2 L1.2 56.525,54.45 56.525,52.9 56.634,52.791 56.634,52.066 v1(56.7,52)
  Bottom Layer w0.254: v1(56.7,52) 56.7,48.84 U8.2
NetC26_2: C26.2 D1.A D2.K F1.2 | length 10.4
  Top Layer w0.254: v1(43.175,47.4) 43.925,47.4 44.3,47.025 46.05,47.025 F1.2 49.45,47 D1.A
  Bottom Layer w0.254: C26.2 43.162,45.888 43.162,47.387 v1(43.175,47.4) D2.K
NetC27_2: C27.2 C28.2 D1.K U8.1 | length 11.1
  Top Layer w0.254: C27.2 48.525,51.125 48.775,51.375 v1(49.5,51.375) D1.K C28.2
  Bottom Layer w0.254: U8.1 49.175,48.895 49.175,50.5 49.5,50.825 v1(49.5,51.375)
NetR14_2: R14.2 U6.35 | length 13.1
  Top Layer w0.254: v1(72.8,50.85) 73.721,49.929 73.721,48.404 76.15,45.975 R14.2
  Bottom Layer w0.254: U6.35 68.827,53.673 69.502,53.673 69.675,53.5 69.675,52.2 69.975,51.9 71.75,51.9 v1(72.8,50.85)
NetR15_1: R15.1 U11.4 | length 5.5
  Top Layer w0.254: R15.1 70.8,49.65 71.375,50.225 U11.4
NetR16_1: R16.1 R17.2 U9.4 | length 6.1
  Top Layer w0.254: v1(72.175,41.925) 72.8,41.925 72.95,42.075 R17.2 R16.1
  Bottom Layer w0.254: U9.4 71.88,42.97 72.175,42.675 v1(72.175,41.925)
NetU2_1: U2.1 U6.8 | length 24
  Top Layer w0.254: v1(71.525,49.425) 72.05,49.95 72.05,51.05 72.427,51.427 75.967,51.427 75.994,51.4 79.975,51.4 v1(80.475,50.9)
  Bottom Layer w0.254: U6.8 64.575,51.471 64.494,51.39 64.494,48.731 65.07,48.155 67.805,48.155 69.075,49.425 v1(71.525,49.425) ; U2.1 79.987,50.425 80.462,50.9 v1(80.475,50.9)
NetU2_3: U2.3 U6.10 | length 31.2
  Top Layer w0.254: v1(68.775,47.975) 69.55,47.975 71.725,45.8 74.075,45.8 74.75,45.125 77.725,45.125 77.925,45.325 77.925,46.476 78.101,46.652 80.427,46.652 81.075,47.3 v1(81.075,48.15)
  Bottom Layer w0.254: U6.10 62.35,53.175 62.05,52.875 62.05,51.05 63.525,49.575 63.525,48.65 64.65,47.525 68.325,47.525 v1(68.775,47.975) ; U2.3 80.6,49.425 81.075,48.95 v1(81.075,48.15)
NetU2_10: U2.10 U6.9 | length 21.4
  Top Layer w0.254: v1(63.225,50.825) 63.225,46.863 64.352,45.736 65.836,45.736 67.875,47.775 67.875,48.375 68.3,48.8 72.45,48.8 73.075,49.425 v1(73.1,49.425)
  Bottom Layer w0.254: v1(63.225,50.825) 63.775,50.825 64.075,51.125 U6.9 ; v1(73.1,49.425) U2.10
NetU2_12: U2.12 U6.7 | length 14
  Bottom Layer w0.254: U6.7 65.075,51.4 64.898,51.223 64.898,50.327 65.177,50.048 72.814,50.048 73.691,50.925 75.176,50.925 75.676,50.425 U2.12
NetU3_1: U3.1 U6.24 | length 23.3
  Top Layer w0.254: v1(51.225,60.325) 53,62.1 v1(65.8,62.1)
  Bottom Layer w0.254: U3.1 50,58.65 51.222,59.872 51.222,60.322 v1(51.225,60.325) ; v1(65.8,62.1) 66.575,61.325 U6.24
NetU3_4: U3.4 U6.23 | length 23.7
  Top Layer w0.254: v1(52.35,59.925) 53.725,61.3 59.628,61.3 59.778,61.15 v1(65.775,61.15)
  Bottom Layer w0.254: U3.4 51.375,56.7 52.35,57.675 v1(52.35,59.925) ; v1(65.775,61.15) 65.841,61.084 65.841,60.484 66.075,60.25 U6.23
NRST: P5.1 R11.1 U6.4 | length 28.5
  Top Layer w0.254: v1(67.4,51.225) 67.4,51.319 67.825,51.744 67.825,57.725 70.325,60.225 70.325,60.25 72.575,62.5 73.113,63.038 73.113,64.36 73.878,65.125 73.9,65.125 74.14,65.365 74.14,66.475 ; P5.1 72.8,70.05 74.14,68.71 74.14,66.475 ; R11.1 74.14,66.475
  Bottom Layer w0.254: U6.4 66.577,52.423 66.577,51.648 66.972,51.253 67.372,51.253 v1(67.4,51.225)
SCL: R13.1 U1.16 U6.33 U7.1 | length 22.4
  Top Layer w0.254: v1(76.025,57.7) 74.975,58.75 74.975,62.75 75.6,63.375 U7.1
  Bottom Layer w0.254: U6.33 74.275,54.675 77.325,57.725 ; R13.1 v1(76.025,57.7) 76.05,57.725 77.325,57.725 ; U1.16 77.325,57.725
SDA: R12.1 U1.15 U6.34 U7.3 | length 17
  Top Layer w0.254: U7.3 77.175,58.85 77.675,58.35 v1(77.675,57.075)
  Bottom Layer w0.254: U6.34 74.346,54.175 76.221,56.05 R12.1 76.982,56.107 76.982,56.732 77.272,57.022 77.716,57.022 77.919,57.225 U1.15
SWCLK: P5.2 U6.28 | length 10.4
  Top Layer w0.254: v1(71.05,63.9) P5.2
  Bottom Layer w0.254: U6.28 69.65,57.175 69.825,57.35 69.825,59.8 71.05,61.025 v1(71.05,63.9)
SWDIO: P5.4 U6.25 | length 9.8
  Top Layer w0.254: v1(69.78,63.95) P5.4
  Bottom Layer w0.254: U6.25 67.075,62 67.425,62.35 68.18,62.35 v1(69.78,63.95)
UART-RX: P4.2 U6.22 | length 15.8
  Bottom Layer w0.254: P4.2 59,64.125 64.5,64.125 65.079,63.546 65.079,59.846 65.575,59.35 U6.22
UART-TX: P4.3 U6.21 | length 17.8
  Bottom Layer w0.254: P4.3 56.935,63.65 64.35,63.65 64.675,63.325 64.675,59.6 65.075,59.2 U6.21
VBAT-F: C24.2 C25.2 L1.1 U11.1 | length 14.1
  Top Layer w0.254: C25.2 C24.2 L1.1 56.585,58.09 U11.1
VREG: C29.2 C31.2 C32.2 C33.2 R15.2 U9.8 U10.1 U11.3 | length 24.7
  Top Layer w0.254: v1@60.55,50.725 60.55,52.936 C32.2 C31.2 U11.3 65.525,50.275 66.15,49.65 R15.2 67.175,47.875 66.008,46.708 65.072,46.708 C33.2
  Bottom Layer w0.254: v1@60.55,50.725 61.625,50.725 62.3,50.05 U10.1 62.34,46.625 63.475,46.625 63.63,46.78 U9.8
  other v1: 60.624,50.725
pads on no net: P1.15 P2.MH1 P2.MH2 P2.MH3 P2.MH4 P2.MH5 P5.3 P5.9 P5.10 U1.14 U2.6 U2.7 U6.2 U6.3 U6.11 U6.12 U6.13 U6.14 U6.15 U6.16 U6.17 U6.20 U9.2 U9.7 U11.6

## Polygon pours and split planes (outlines as drawn)
5V on Int1 (PWR) "5V_L02_P007" (solid, pour order 7): 25.375,79.425 111.375,79.425 111.375,25.425 25.375,25.425
3.3V on Int1 (PWR) "3.3V_L02_P006" (solid, pour order 6): 62.175,65.55 79.275,65.55 79.275,64.525 72.3,64.525 72.3,49.95 65.525,49.95 65.525,40.975 62.175,40.975
GND on Top Layer "GND_L01_P000" (solid, remove dead copper, pour order 0): 25.375,79.425 111.375,79.425 111.375,25.425 25.375,25.425
GND on Bottom Layer "GND_L04_P001" (solid, remove dead copper, pour order 1): 25.375,79.425 111.375,79.425 111.375,25.425 25.375,25.425
GND on Int2 (GND) "GND_L03_P004" (solid, pour order 4): 25.375,79.425 111.375,79.425 111.375,25.425 25.375,25.425